# EAGLE board DarkESC (EAGLE 9.0.0)
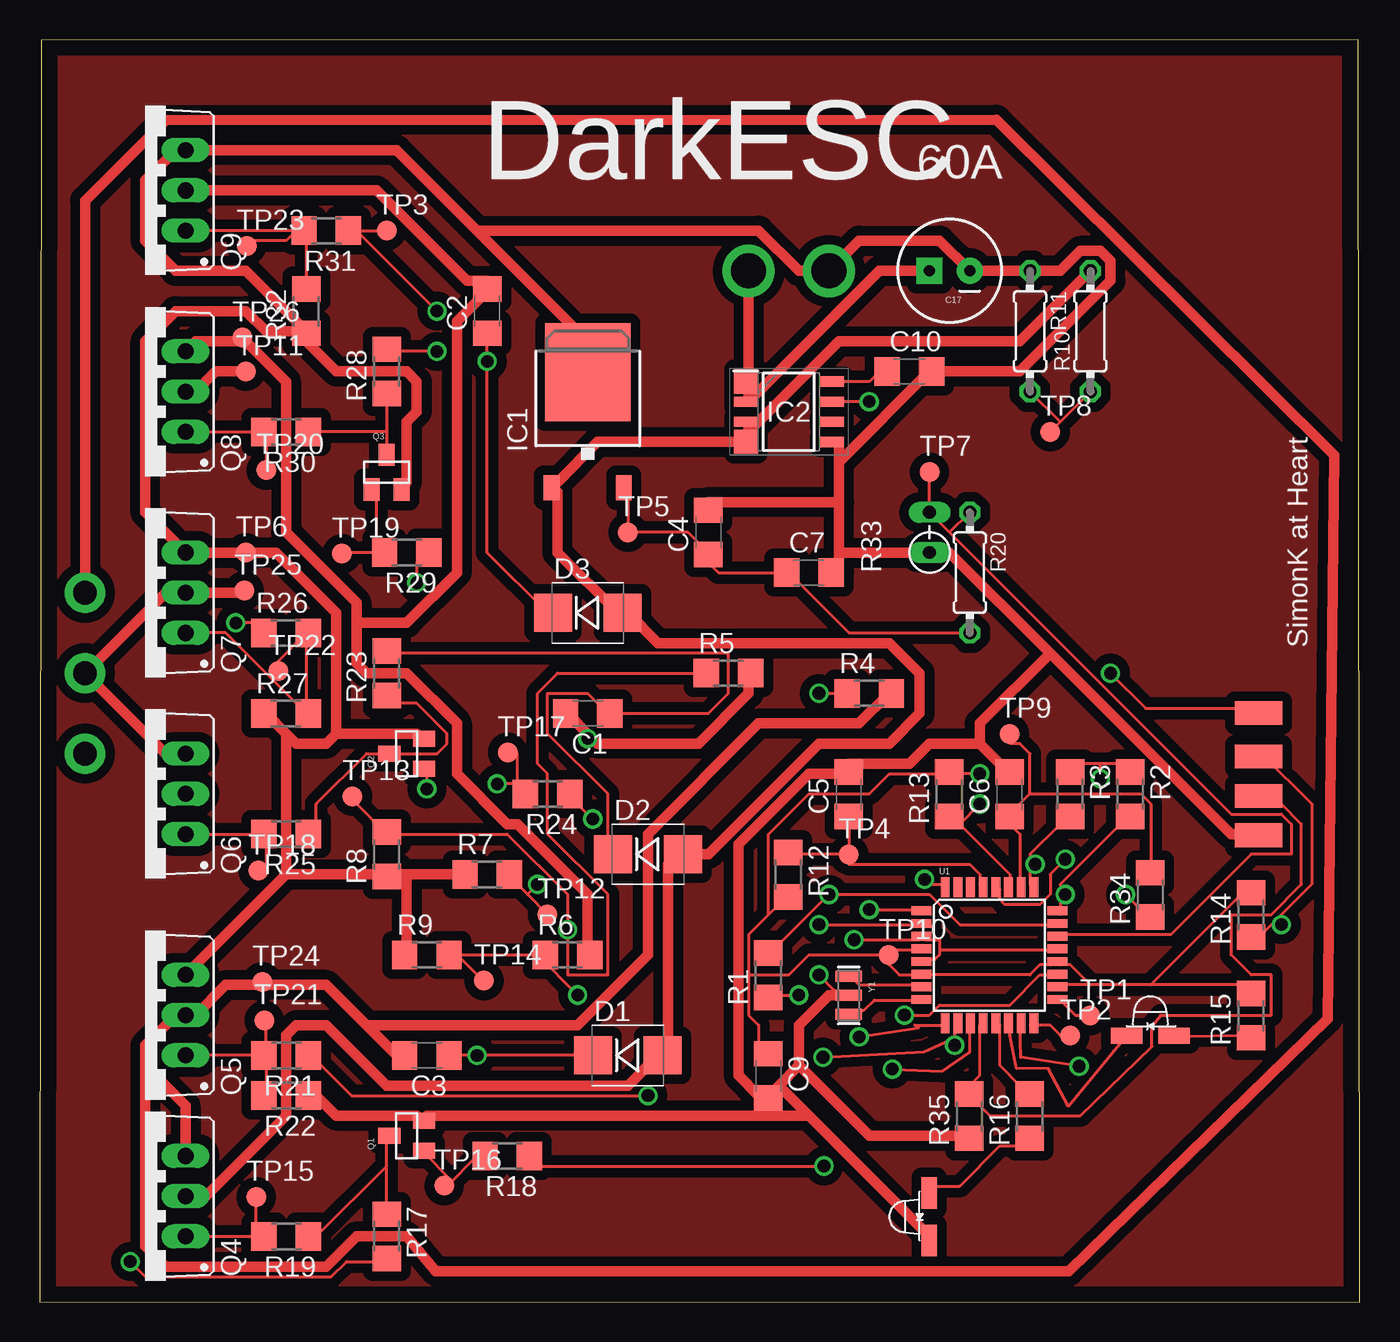
[diagram p0: board, top side]
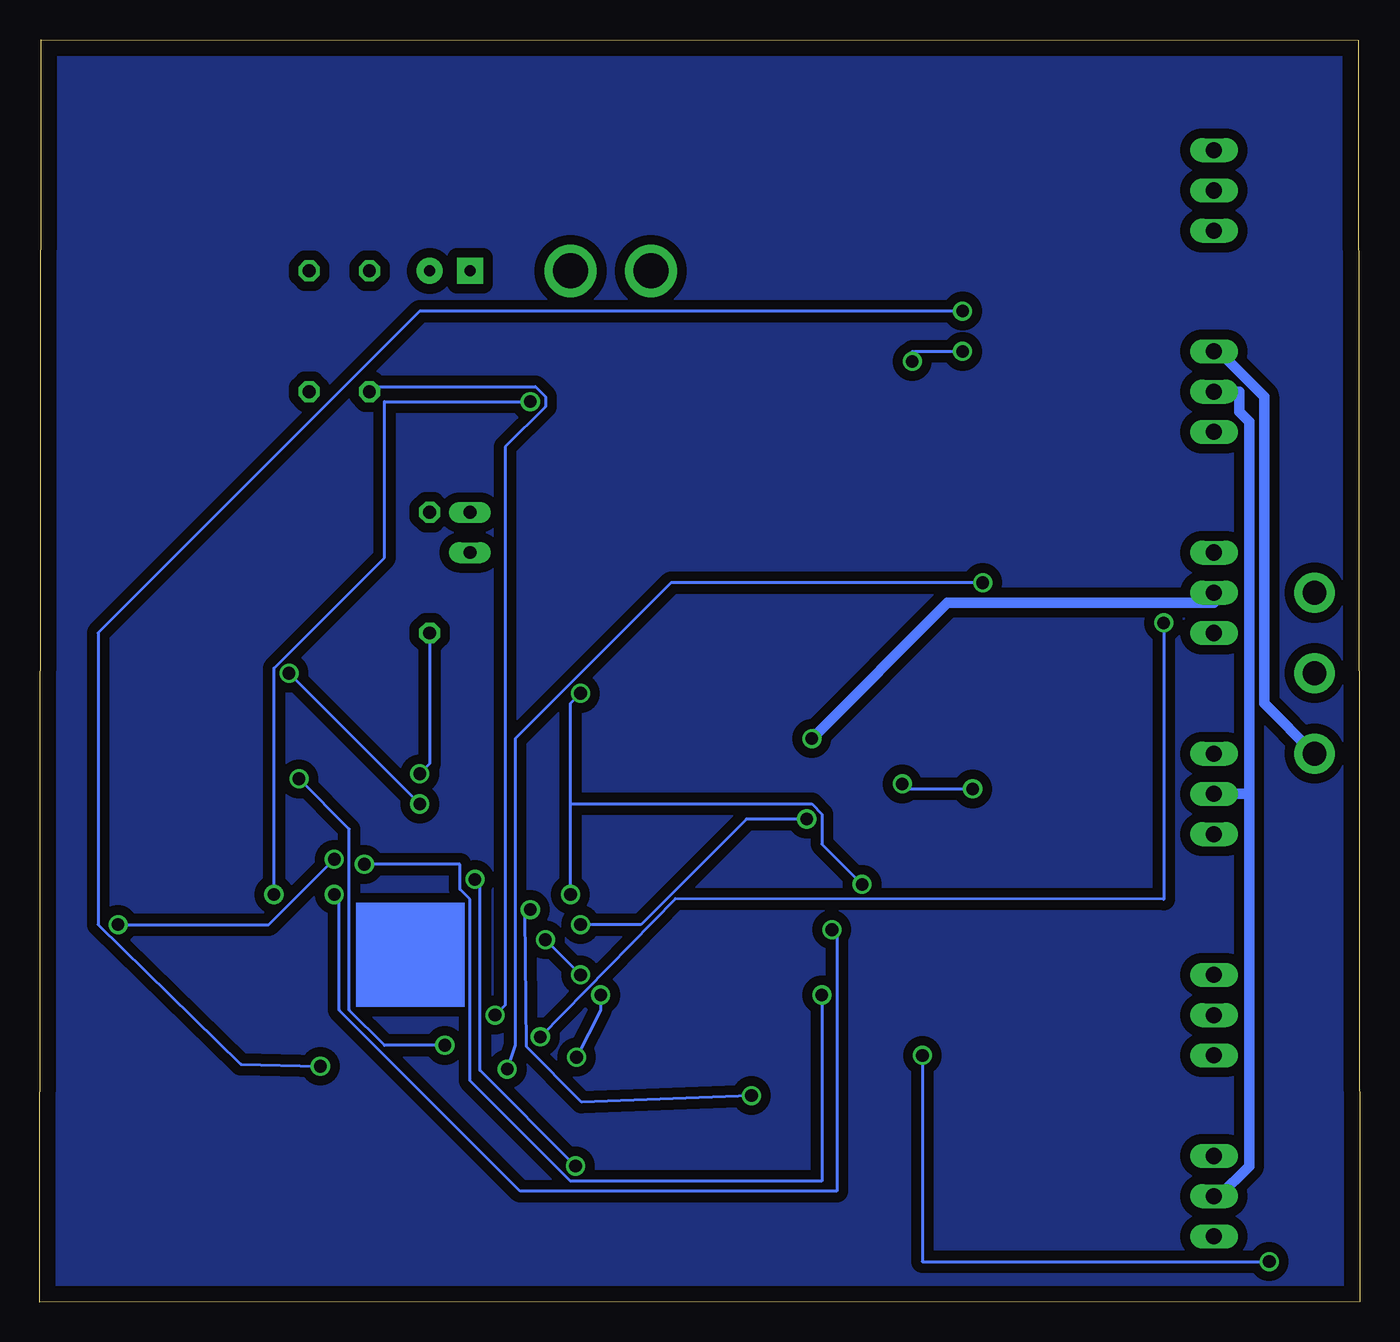
[diagram p1: board, bottom side, seen from below]

Size 83.39 x 79.73 mm. Coordinates in mm from the lower left corner, seen from the top.
Outline: 0,0.05 83.39,0 83.29,79.73 0.1,79.68 0,0.05
Copper layers (1*16): Top 0.035mm / dielectric 1.5mm / Bottom 0.035mm
Design rules "default *": minimum track width 6mil, minimum drill 0.8mm, track to track 6mil, track to pad 6mil, pad to pad 6mil, via to via 6mil, smd to smd 6mil, copper to edge 40mil, drill to drill 6mil, minimum pad ring 10mil, minimum via ring 8mil, stop-mask expansion 4mil, vias tented up to drill 0mil, thermal gap 10mil
Net classes: 0 default: width 0.203 mm, clearance 0.152 mm; 1 HP: width 0.66 mm, clearance 0.203 mm

## Footprints (pad centres in the part's own frame; a part is rotated, then mirrored left to right if it is on the bottom)
C3216 = smd 1.6 x 1.8: 1 -1.4,0; 2 1.4,0
CPOL-RADIAL-100UF-25V = drill 0.7 pad 1.651 square: 1 1.27,0 | drill 0.7 pad 1.651: 2 -1.27,0
SMB-DIODE = smd 2.4 x 2.4: A 2.2,0; C -2.2,0
TO252 = smd 1 x 1.6: 1 -2.28,-4.8; 2 2.28,-4.8 | smd 5.4 x 6.2: 3 0,2.5
SOIC127P600X175-8N = smd 1.525 x 1.524: 1 -2.712,1.905; 4 -2.712,-1.905 | smd 1.525 x 0.65: 2 -2.712,0.635; 3 -2.712,-0.635; 5 2.712,-1.905; 6 2.712,-0.635; 7 2.712,0.635; 8 2.712,1.905
SMT-LED-3X2-RA = smd 2 x 1: 1 1.5,0; 2 -1.5,0
SOT23 = smd 1 x 1.4: 1 -0.95,-1.1; 2 0.95,-1.1; 3 0,1.1
TO220BV = drill 1.016 long: D 0,-2.54; G -2.54,-2.54; S 2.54,-2.54
R3216 = smd 1.6 x 1.8: 1 -1.4,0; 2 1.4,0
0204/7 = drill 0.813 octagon: 1 -3.81,0; 2 3.81,0
RS-2,5 = drill 0.813 long: 1 -1.27,0; 2 1.27,0
B1,27 = smd 1.27 x 1.27: TP 0,0
TQFP32-08 = smd 1.27 x 0.559: 1 -4.293,2.8; 2 -4.293,2; 3 -4.293,1.2; 4 -4.293,0.4; 5 -4.293,-0.4; 6 -4.293,-1.2; 7 -4.293,-2; 8 -4.293,-2.8; 17 4.293,-2.8; 18 4.293,-2; 19 4.293,-1.2; 20 4.293,-0.4; 21 4.293,0.4; 22 4.293,1.2; 23 4.293,2; 24 4.293,2.8 | smd 0.559 x 1.27: 9 -2.8,-4.293; 10 -2,-4.293; 11 -1.2,-4.293; 12 -0.4,-4.293; 13 0.4,-4.293; 14 1.2,-4.293; 15 2,-4.293; 16 2.8,-4.293; 25 2.8,4.293; 26 2,4.293; 27 1.2,4.293; 28 0.4,4.293; 29 -0.4,4.293; 30 -1.2,4.293; 31 -2,4.293; 32 -2.8,4.293
PAD-PTH-MED-1 = drill 2.2 pad 3.302: P$1 0,0
PAD-PTH-18AWG-1 = drill 1.5 pad 2.54: P$1 0,0
PAD-1.5X3MM = smd 3 x 1.5: P$1 0,0
RESONATOR-SMD = smd 0.7 x 1.7: 1 -1.2,0; 2 0,0; 3 1.2,0

## Placement (x,y rotation side)
C1  1uF 60V  [C3216]  34.62,37.19 180 top
C2  1uF 60V  [C3216]  28.27,62.59 90 top
C3  1uF 60V  [C3216]  24.46,15.6 180 top
C4  0.1uF  [C3216]  42.24,48.62 90 top
C5  0.1uF  [C3216]  51.1,32.08 90 top
C6  1uF  [C3216]  61.26,32.08 90 top
C7  0.1uF  [C3216]  48.59,46.08 0 top
C9  1uF  [C3216]  46.02,14.3 270 top
C10  0.1uF  [C3216]  54.94,58.78 0 top
C17  1000uF  [CPOL-RADIAL-100UF-25V]  57.48,65.13 180 top
D1  Schottky  [SMB-DIODE]  37.16,15.6 0 top
D2  Schottky  [SMB-DIODE]  38.43,28.3 0 top
D3  Schottky  [SMB-DIODE]  34.62,43.54 0 top
IC1  7805DT  [TO252]  34.62,56.24 0 top
IC2  ACS712ELCTR-20A-T  [SOIC127P600X175-8N]  47.32,56.24 0 top
LED1  BLUE  [SMT-LED-3X2-RA]  70.15,16.84 0 top
LED2  RED  [SMT-LED-3X2-RA]  56.18,5.41 90 top
Q1  BC817-40W  [SOT23]  23.19,10.52 90 top
Q2  BC817-40W  [SOT23]  23.19,34.65 90 top
Q3  BC817-40W  [SOT23]  21.92,52.43 0 top
Q4  IRF520  [TO220BV]  6.68,6.71 90 top
Q5  IRF520  [TO220BV]  6.68,18.14 90 top
Q6  IRF520  [TO220BV]  6.68,32.11 90 top
Q7  IRF520  [TO220BV]  6.68,44.81 90 top
Q8  IRF520  [TO220BV]  6.68,57.51 90 top
Q9  IRF520  [TO220BV]  6.68,70.21 90 top
R1  47K  [R3216]  46.02,20.65 90 top
R2  47K  [R3216]  68.88,32.08 270 top
R3  47K  [R3216]  65.07,32.08 270 top
R4  47K  [R3216]  52.4,38.46 0 top
R5  47K  [R3216]  43.51,39.73 0 top
R6  47K  [R3216]  33.35,21.95 0 top
R7  4.7K  [R3216]  28.27,27.03 0 top
R8  4.7K  [R3216]  21.92,28.3 90 top
R9  4.7K  [R3216]  24.46,21.95 0 top
R10  18K 1%  [0204/7]  66.37,61.32 90 top
R11  3.3K 1%  [0204/7]  62.56,61.32 270 top
R12  10K  [R3216]  47.29,27 270 top
R13  10K  [R3216]  57.45,32.08 90 top
R14  10K  [R3216]  76.5,24.46 90 top
R15  1K  [R3216]  76.5,18.11 90 top
R16  4.7K  [R3216]  62.53,11.76 90 top
R17  2.2K  [R3216]  21.92,4.17 270 top
R18  4.7K  [R3216]  29.54,9.25 180 top
R19  100  [R3216]  15.57,4.17 180 top
R20  3.3K 1%  [0204/7]  58.75,46.08 270 top
R21  100  [R3216]  15.57,15.6 180 top
R22  10K  [R3216]  15.57,13.06 180 top
R23  2.2K  [R3216]  21.92,39.73 90 top
R24  4.7K  [R3216]  32.08,32.11 180 top
R25  100  [R3216]  15.57,29.57 180 top
R26  100  [R3216]  15.57,42.27 0 top
R27  10K  [R3216]  15.57,37.19 0 top
R28  2.2K  [R3216]  21.92,58.78 90 top
R29  4.7K  [R3216]  23.19,47.35 180 top
R30  100  [R3216]  15.57,54.97 180 top
R31  100  [R3216]  18.11,67.67 180 top
R32  10K  [R3216]  16.84,62.59 90 top
R33  10K NTC  [RS-2,5]  56.21,48.62 90 top
R34  47K  [R3216]  70.15,25.73 90 top
R35  470K  [R3216]  58.72,11.76 90 top
TP1  TPB1,27  [B1,27]  66.34,18.11 0 top
TP2  TPB1,27  [B1,27]  65.07,16.84 0 top
TP3  TPB1,27  [B1,27]  21.92,67.67 0 top
TP4  TPB1,27  [B1,27]  51.1,28.27 0 top
TP5  TPB1,27  [B1,27]  37.16,48.62 0 top
TP6  TPB1,27  [B1,27]  13.03,47.35 0 top
TP7  TPB1,27  [B1,27]  56.21,52.43 0 top
TP8  TPB1,27  [B1,27]  63.83,54.97 0 top
TP9  TPB1,27  [B1,27]  61.26,35.89 0 top
TP10  TPB1,27  [B1,27]  53.64,21.92 0 top
TP11  TPB1,27  [B1,27]  13.03,58.78 0 top
TP12  TPB1,27  [B1,27]  32.08,24.49 0 top
TP13  TPB1,27  [B1,27]  19.76,31.95 0 top
TP14  TPB1,27  [B1,27]  28.07,20.32 0 top
TP15  TPB1,27  [B1,27]  13.69,6.65 0 top
TP16  TPB1,27  [B1,27]  25.55,7.37 0 top
TP17  TPB1,27  [B1,27]  29.57,34.72 0 top
TP18  TPB1,27  [B1,27]  13.82,27.25 0 top
TP19  TPB1,27  [B1,27]  19.1,47.27 0 top
TP20  TPB1,27  [B1,27]  14.33,52.55 0 top
TP21  TPB1,27  [B1,27]  14.2,17.81 0 top
TP22  TPB1,27  [B1,27]  15.09,39.85 0 top
TP23  TPB1,27  [B1,27]  13.08,66.7 0 top
TP24  TPB1,27  [B1,27]  14.07,20.24 0 top
TP25  TPB1,27  [B1,27]  12.93,44.93 0 top
TP26  TPB1,27  [B1,27]  12.8,60.91 0 top
U1  ATMEGA168  [TQFP32-08]  59.99,21.92 0 top
U$1  PADPTH-MED  [PAD-PTH-MED-1]  44.78,65.13 0 top
U$2  PADPTH-MED  [PAD-PTH-MED-1]  49.86,65.13 0 top
U$5  PAD18AWG  [PAD-PTH-18AWG-1]  2.87,44.81 0 top
U$6  PAD18AWG  [PAD-PTH-18AWG-1]  2.87,39.73 0 top
U$7  PAD18AWG  [PAD-PTH-18AWG-1]  2.87,34.65 0 top
U$11  PAD1.5X3MM  [PAD-1.5X3MM]  76.99,29.49 0 top
U$12  PAD1.5X3MM  [PAD-1.5X3MM]  76.99,37.21 0 top
U$13  PAD1.5X3MM  [PAD-1.5X3MM]  76.99,34.47 0 top
U$14  PAD1.5X3MM  [PAD-1.5X3MM]  76.99,31.98 0 top
Y1  RESONATORSMD  [RESONATOR-SMD]  51.1,19.38 270 top

## Library data of the parts
C1-C7 C9 C10 = rcl; SPICEPREFIX: C
C17 = SparkFun-Capacitors
D1-D3 = SparkFun-DiscreteSemi; PROD_ID: DIO-09646
IC1 = linear
IC2 = SamacSys_Parts; ALLIED_NUMBER: R1076682; ALLIED_PRICE/STOCK: http://www.alliedelec.com/allegro-microsystems-acs712elctr-20a-t/R1076682/; ARROW_PART_NUMBER: ACS712ELCTR-20A-T; ARROW_PRICE/STOCK: https://www.arrow.com/en/products/acs712elctr-20a-t/allegro-microsystems; DESCRIPTION: ACS712ELCTR-20A-T, Hall Effect Sensor 5V 8-Pin SOIC, SOIC N; HEIGHT: 1.75mm; MANUFACTURER_NAME: Allegro Microsystems; MANUFACTURER_PART_NUMBER: ACS712ELCTR-20A-T; RS_PART_NUMBER: 1729271; RS_PRICE/STOCK: http://uk.rs-online.com/web/p/products/1729271
LED1 LED2 U$1 U$2 U$5-U$7 U$11-U$14 = BR-Eagle-Library
Q1-Q3 = SparkFun-DiscreteSemi
Q4-Q9 = transistor-power
R1-R32 R34 R35 = resistor
R33 = varistor
TP1-TP26 = testpad
U1 = SparkFun-DigitalIC
Y1 = SparkFun

## Nets
CENTER: R1.1 R2.1 R3.1 U1.10
CURRENT_ADC: IC2.7 R34.1
CURRENT_ADC_FILTERED: C6.1 R34.2 TP9.TP U1.26
GATE_AH: Q4.G R19.2 TP15.TP
GATE_AL: Q5.G R21.2 R22.2 TP21.TP
GATE_BH: Q6.G R25.2 TP18.TP
GATE_BL: Q7.G R26.2 R27.2 TP22.TP
GATE_CH: Q8.G R30.2 TP20.TP
GATE_CL: Q9.G R31.2 R32.2 TP23.TP
GND: C4.2 C5.2 C6.2 C7.2 C9.2 C10.2 C17.2 IC1.3 IC2.5 LED2.2 Q1.2 Q2.2 Q3.2 Q5.S Q7.S Q9.S R7.1 R8.1 R9.1 R11.1 R22.1 R27.1 R32.1 R33.1 R35.1 TP6.TP U1.3 U1.5 U1.21 U$2.P$1 U$11.P$1 Y1.2
LED_STATUS: LED1.2 U1.14
LED_WARN: R16.2 U1.13
MISO: TP2.TP U1.16
N$2: Q1.1 R18.2 TP16.TP
N$3: LED2.1 R16.1
N$4: Q1.3 R17.1 R19.1
N$5: Q2.1 R24.2 TP17.TP
N$6: Q2.3 R23.1 R25.1
N$7: Q3.1 R29.2 TP19.TP
N$9: Q3.3 R28.1 R30.1
N$10: U1.7 Y1.1
N$11: U1.8 Y1.3
N$12: C3.1 D1.C R17.2
N$15: C1.1 D2.C R23.2
N$16: LED1.1 R15.1
N$19: C2.1 D3.C R28.2
PHASE_A [HP]: C3.2 Q4.S Q5.D R4.2 TP24.TP U$5.P$1
PHASE_B [HP]: C1.2 Q6.S Q7.D R5.2 TP25.TP U$6.P$1
PHASE_C [HP]: C2.2 Q8.S Q9.D R6.2 TP26.TP U$7.P$1
PWM: R35.2 U1.12 U$14.P$1
PWM_AH: R18.1 U1.32
PWM_AL: R21.1 U1.1
PWM_BH: R24.1 U1.2
PWM_BL: R26.1 U1.9
PWM_CH: R29.1 U1.11
PWM_CL: R31.1 TP3.TP U1.15
RESET: C5.1 R12.1 TP4.TP U1.29
RX: U1.30
SCK: TP1.TP U1.17
SCL: R14.1 U1.28 U$13.P$1
SDA: R13.1 U1.27 U$12.P$1
SENSE_A: R1.2 R4.1 R7.2 TP12.TP U1.23
SENSE_B: R2.2 R5.1 R8.2 TP13.TP U1.24
SENSE_C: R3.2 R6.1 R9.2 TP14.TP U1.25
TEMP_ADC: R20.1 R33.2 TP7.TP U1.22
TX: U1.31
VBAT [HP]: D1.A D2.A D3.A IC1.1 IC2.3 IC2.4 Q4.D Q6.D Q8.D R10.2 TP11.TP
VBAT+ [HP]: C17.1 IC2.1 IC2.2 U$1.P$1
VBAT_ADC: R10.1 R11.2 TP8.TP U1.19
VCC5V: C4.1 C7.1 C9.1 IC1.2 R12.2 R13.2 R14.2 R15.2 R20.2 TP5.TP TP10.TP U1.4 U1.6 U1.18 U1.20
VCC5V-2: C10.1 IC2.8

## Tracks (layer width: path | path; a pad name or v marks a point on that pad's centre or on a via)
CENTER  (via drill 0.8)
  Top 0.203: 67.01,34.01 68.28,34.01 R2.1 | 67.01,34.01 65.1,34.01 R3.1 | 57.48,16.55 55.85,15.81 v49.48,15.48 | 57.48,16.55 57.8,16.87 57.8,17.5 U1.10 | v47.96,19.41 46.05,19.41 R1.1 | v67.01,33.06 67.01,34.01 | 57.48,16.55 v57.8,16.23
  Bottom 0.203: v49.48,15.48 47.96,18.45 v47.96,19.41 | v67.01,33.06 63.83,29.88 63.83,18.45 61.61,16.23 v57.8,16.23
CURRENT_ADC  (via drill 0.8)
  Top 0.203: v52.4,56.87 IC2.7 | v68.59,25.76 69.86,24.49 R34.1
  Bottom 0.203: v52.4,56.87 61.61,56.87 61.61,47.03 68.59,40.04 v68.59,25.76
CURRENT_ADC_FILTERED
  Top 0.203: U1.26 61.93,26.39 61.93,29.57 61.29,30.2 C6.1 61.29,30.84 62.56,32.11 | 62.56,32.11 62.56,34.65 61.93,35.28 61.29,35.28 TP9.TP | 62.56,32.11 69.55,32.11 70.18,31.47 70.18,27.66 R34.2
GATE_AH
  Top 0.203: 13.67,4.17 13.67,6.07 TP15.TP | Q4.G 13.67,4.17 | 13.67,4.17 R19.2
GATE_AL
  Top 0.203: 14.3,15.6 14.3,17.5 TP21.TP | 14.3,15.6 14.3,13.06 R22.2 | 14.3,15.6 R21.2 Q5.G
GATE_BH
  Top 0.203: TP18.TP 14.3,27.66 14.3,29.57 R25.2 Q6.G
GATE_BL
  Top 0.203: 16.84,42.27 14.94,40.36 TP22.TP | 16.84,42.27 16.84,37.19 | 16.84,42.27 R26.2 | Q7.G 11.76,42.27 16.84,37.19 | 16.84,37.19 R27.2
GATE_CH
  Top 0.203: TP20.TP 14.3,53.06 14.3,54.97 R30.2 Q8.G
GATE_CL
  Top 0.203: 16.21,67.67 15.57,67.03 13.03,67.03 TP23.TP | R32.2 16.84,67.67 R31.2 16.21,67.67 | 16.21,67.67 Q9.G
GND  (via drill 0.8)
  Top 0.203: 56.85,22.26 56.85,22.9 55.89,22.9 U1.3 55.58,22.9 v51.45,22.9 | 56.85,22.26 56.85,21.95 56.53,21.63 55.89,21.63 U1.5 | 56.85,22.26 64.15,22.26 U1.21 | v49.23,20.68 50.18,19.72 50.18,19.41
  Top 0.66: Q3.2 23.19,51.79 23.19,55.6 23.83,56.24 23.83,58.14 23.19,58.78 18.75,58.78 16.84,60.68 R32.1 16.84,61.32 | R7.1 23.19,27.03 | 23.19,27.03 21.92,27.03 | 23.19,27.03 23.19,21.95 R9.1 | 18.75,35.92 23.83,35.92 Q2.2 | 18.75,35.92 18.11,35.28 16.21,35.28 15.57,35.92 | 15.57,35.92 14.3,37.19 R27.1 | 15.57,27.03 Q5.S | 15.57,35.92 15.57,27.03 | 18.75,35.92 18.75,43.54 14.94,47.35 TP6.TP Q7.S 6.68,49.89 6.68,60.68 8.59,62.59 13.03,62.59 14.3,61.32 16.84,61.32 | 15.57,27.03 21.92,27.03 | 21.92,27.03 R8.1 | 27.64,67.67 34.62,60.68 IC1.3 | 27.64,67.67 22.56,72.75 Q9.S 8.59,72.75 6.68,70.84 6.68,67.03 8.59,65.13 13.03,65.13 16.84,61.32 | 27.64,67.67 45.42,67.67 47.96,65.13 U$2.P$1 51.77,67.03 56.85,67.03 C17.2 R11.1 64.47,65.13 65.74,66.4 67.01,66.4 67.64,65.76 67.64,64.49 61.93,58.78 C10.2 56.21,58.78 50.5,53.06 | R22.1 17.48,13.06 18.75,11.79 23.83,11.79 Q1.2 24.46,11.79 48.59,11.79 | 47.96,14.96 47.96,17.5 49.86,19.41 50.18,19.41 50.5,19.41 Y1.2 | 46.69,13.69 46.05,13.06 C9.2 | 46.69,13.69 47.96,14.96 | 47.96,14.96 52.4,10.52 58.12,10.52 R35.1 | 46.69,13.69 48.59,11.79 | 48.59,11.79 56.21,4.17 LED2.2 | 46.69,13.69 C9.2 | 59.39,35.28 56.21,35.28 54.94,34.01 51.13,34.01 C5.2 50.5,33.38 48.59,33.38 44.15,28.93 44.15,14.33 45.42,13.06 C9.2 | 59.39,35.28 60.66,34.01 C6.2 | 50.5,47.35 50.5,46.08 C7.2 | 50.5,47.35 50.5,50.52 | 50.5,50.52 50.5,53.06 | 50.5,53.06 50.5,54.33 IC2.5 | 50.5,50.52 42.24,50.52 C4.2 | 50.5,47.35 R33.1 57.48,47.35 63.83,41 | 63.83,41 75.26,29.57 76.53,29.57 U$11.P$1 | 59.39,35.28 59.39,36.55 63.83,41
  Bottom 0.203: v49.23,20.68 v51.45,22.9
LED_STATUS
  Top 0.203: U1.14 61.29,17.5 61.29,16.87 61.7,14.78 63.73,14.76 64.97,12.4 LED1.2
LED_WARN
  Top 0.203: U1.13 60.66,17.5 60.66,14.96 61.93,13.69 R16.2
MISO
  Top 0.203: U1.16 62.56,17.5 63.83,17.5 64.47,16.87 TP2.TP
N$1
  pour Top (isolate 0.61): 0.33,79.86 0.33,0.15 83.16,0.15 83.16,79.88 0.33,79.88
N$2
  Top 0.203: Q1.1 24.46,9.25 25.73,7.98 TP16.TP 25.73,7.34 27.64,9.25 R18.2
N$3
  Top 0.203: R16.1 61.93,9.88 60.66,9.88 58.12,7.34 56.21,7.34 LED2.1
N$4
  Top 0.203: R17.1 21.92,8.61 | 21.92,8.61 21.92,10.52 Q1.3 | 21.92,8.61 17.48,4.17 R19.1
N$5  (via drill 0.8)
  Top 0.203: 30.18,32.74 30.18,32.11 R24.2 30.18,32.74 | 30.18,32.74 30.18,34.65 TP17.TP | v24.46,32.42 24.46,33.69 Q2.1 | 30.18,32.74 v28.91,32.74
  Bottom 0.203: v24.46,32.42 28.91,32.42 v28.91,32.74
N$6
  Top 0.203: R25.1 17.48,29.57 17.48,31.47 20.65,34.65 Q2.3 25.1,34.65 25.73,35.28 25.73,35.92 23.83,37.82 21.92,37.82 R23.1
N$7
  Top 0.203: 21.29,47.35 19.38,47.35 TP19.TP | 21.29,47.35 21.29,51.16 Q3.1 | 21.29,47.35 R29.2
N$8
  pour Bottom (isolate 0.61): 0.1,79.68 0.1,0 83.39,0 83.39,79.68
N$9
  Top 0.203: R28.1 21.92,54.97 | 21.92,54.97 Q3.3 | 21.92,54.97 R30.1
N$10
  Top 0.203: U1.7 55.58,20.04 51.77,20.04 51.13,20.68 Y1.1
N$11
  Top 0.203: U1.8 55.58,19.09 52.72,19.09 52.08,18.45 51.13,18.45 Y1.3
N$12  (via drill 0.8)
  Top 0.203: D1.C v27.64,15.6 C3.1 | v5.73,2.58 6.68,1.63 18.43,1.63 19.38,2.58 21.92,2.58 R17.2
  Bottom 0.203: v5.73,2.58 27.64,2.58 v27.64,15.6
N$15
  Top 0.203: D2.C 35.89,28.3 35.89,32.11 32.08,35.92 32.08,38.46 34.62,38.46 35.89,37.19 C1.1 42.24,37.19 43.51,38.46 43.51,41 21.92,41 R23.2
N$16
  Top 0.203: R15.1 75.9,16.87 72.06,16.79 LED1.1
N$19  (via drill 0.8)
  Top 0.203: C2.1 v28.27,59.41 28.27,47.35 32.08,43.54 D3.C | v25.1,60.05 21.92,60.05 R28.2
  Bottom 0.203: v25.1,60.05 28.27,60.05 v28.27,59.41
PHASE_A
  Top 0.66: 20.65,17.5 22.56,15.6 C3.2 | 20.65,17.5 18.11,20.04 14.3,20.04 TP24.TP 13.67,20.04 11.76,20.04 9.86,18.14 Q5.D 8.59,18.14 6.68,16.23 6.68,14.96 | 20.65,17.5 33.99,17.5 38.43,21.95 38.43,29.57 45.42,36.55 51.77,36.55 53.67,38.46 R4.2 | Q4.S 9.22,12.42 6.68,14.96 | U$5.P$1 2.87,69.57 7.95,74.65 60.43,74.68 81.76,53.49 81.36,17.91 65.02,1.98 25.02,1.98 23.19,4.17 20.02,4.17 18.11,2.26 7.95,2.26 6.68,3.53 6.68,14.96
PHASE_B  (via drill 0.8)
  Top 0.66: TP25.TP 12.4,44.81 Q7.D 7.95,44.81 U$6.P$1 7.95,34.65 Q6.S | 34.78,35.76 35.26,35.28 41.61,35.28 44.78,38.46 44.78,39.73 R5.2 | 34.78,35.76 33.35,37.19 C1.2 | v34.62,35.6 34.78,35.76
  Bottom 0.66: v34.62,35.6 26.05,44.17 9.22,44.17 Q7.D
PHASE_C
  Top 0.66: Q9.D 21.29,70.21 27,64.49 28.27,64.49 C2.2 28.27,63.86 26.37,61.95 26.37,46.08 23.19,42.9 20.02,42.9 | Q8.S 9.86,60.68 12.4,60.68 TP26.TP 15.57,58.14 15.57,48.62 20.02,44.17 20.02,42.9 | 20.02,42.9 20.02,40.36 20.65,39.73 23.19,39.73 26.37,36.55 26.37,33.38 29.54,30.2 30.18,30.2 34.62,25.76 34.62,21.95 R6.2
  Bottom 0.66: U$7.P$1 6.05,37.82 6.05,57.19 8.9,60.05 Q8.S
PWM
  Top 0.203: U1.12 59.39,17.5 59.39,14.33 58.75,13.69 R35.2 58.75,13.06 60.02,11.79 65.74,11.79 70.26,16.15 70.26,17.42 70.82,18.14 77.8,18.14 77.8,20.68 76.53,20.68 75.26,21.95 75.26,24.49 77.8,24.49 79.71,26.39 79.71,30.2 78.44,31.47 77.17,31.47 U$14.P$1
PWM_AH  (via drill 0.8)
  Top 0.203: v55.89,26.71 56.21,26.39 57.16,26.39 U1.32 | v49.54,8.61 31.76,8.61 31.13,9.25 R18.1
  Bottom 0.203: v55.89,26.71 55.58,26.39 55.58,14.64 v49.54,8.61
PWM_AL  (via drill 0.8)
  Top 0.203: v52.4,24.8 55.58,24.8 U1.1 | v38.43,13.06 19.7,13.06 17.16,15.6 R21.1
  Bottom 0.203: v52.4,24.8 52.72,24.49 52.64,16.14 49.15,12.65 v38.43,13.06
PWM_BH  (via drill 0.8)
  Top 0.203: v49.23,23.85 55.58,23.85 U1.2 | v34.94,30.52 33.35,32.11 R24.1
  Bottom 0.203: v49.23,23.85 45.42,23.85 38.75,30.52 v34.94,30.52
PWM_BL  (via drill 0.8)
  Top 0.203: v51.77,16.76 55.54,17.35 55.26,17.5 57.16,17.5 U1.9 | v12.4,42.9 13.35,42.9 13.98,42.27 R26.1
  Bottom 0.203: v51.77,16.76 43.24,25.49 12.4,25.44 v12.4,42.9
PWM_CH  (via drill 0.8)
  Top 0.203: v53.86,14.73 57.04,14.6 58.75,15.79 58.75,17.5 U1.11 | v23.83,45.44 23.83,46.71 24.46,47.35 R29.1
  Bottom 0.203: v53.86,14.73 53.35,16.23 53.35,35.6 43.51,45.44 v23.83,45.44
PWM_CL  (via drill 0.8)
  Top 0.203: 20.02,67.67 TP3.TP | v65.66,14.91 61.98,15.47 61.93,17.5 U1.15 | 20.02,67.67 v25.1,62.59 | 20.02,67.67 R31.1
  Bottom 0.203: v65.66,14.91 70.69,15.04 79.71,23.85 79.71,42.27 59.39,62.59 v25.1,62.59
RESET
  Top 0.203: TP4.TP 51.13,28.3 51.13,30.2 C5.1 | U1.29 59.39,26.39 59.39,27.03 58.75,27.66 51.13,27.66 TP4.TP | R12.1 47.32,28.3 50.5,28.3 TP4.TP
SCK
  Top 0.203: TP1.TP 66.05,18.14 65.42,18.14 64.47,19.09 U1.17
SCL  (via drill 0.8)
  Top 0.203: 78.12,24.17 80.34,26.39 80.34,31.47 77.17,34.65 U$13.P$1 | 78.12,24.17 77.17,23.22 76.53,23.22 R14.1 | v64.78,27.98 63.83,27.03 63.83,25.76 63.2,25.12 60.97,25.12 60.66,25.44 60.66,26.07 U1.28 | 78.12,24.17 v78.44,23.85
  Bottom 0.203: v64.78,27.98 68.91,23.85 v78.44,23.85
SDA  (via drill 0.8)
  Top 0.203: 58.12,30.2 57.48,30.84 R13.1 58.12,30.2 | 58.12,30.2 61.29,27.03 61.29,26.39 U1.27 | v67.64,39.73 69.86,37.5 76.85,37.5 U$12.P$1 | 58.12,30.2 v59.39,31.47
  Bottom 0.203: v59.39,31.47 v67.64,39.73
SENSE_A  (via drill 0.8)
  Top 0.203: 30.81,25.76 29.54,27.03 R7.2 | 30.81,25.76 TP12.TP | U1.23 63.83,23.85 58.12,23.85 56.21,25.76 v49.86,25.76 46.05,21.95 R1.2 | v49.23,38.46 R4.1 | v31.45,26.39 30.81,25.76
  Bottom 0.203: v49.23,38.46 49.86,37.82 49.86,31.47 | v49.86,25.76 49.86,31.47 | v31.45,26.39 33.99,28.93 33.99,30.84 34.62,31.47 49.86,31.47
SENSE_B  (via drill 0.8)
  Top 0.203: 21.92,29.57 20.02,31.47 TP13.TP | R5.1 32.72,39.73 31.45,38.46 31.45,34.01 32.08,33.38 32.08,29.57 35.89,25.76 35.89,20.68 33.35,20.68 v33.35,23.53 33.35,25.76 29.54,29.57 21.92,29.57 | 21.92,29.57 R8.2 | 64.47,25.76 64.47,26.39 68.28,30.2 R2.2 | 64.47,25.76 64.47,24.49 U1.24 | v64.78,25.76 64.47,25.76
  Bottom 0.203: v64.78,25.76 64.47,25.44 64.47,18.45 53.04,7.02 33.03,7.02 33.03,23.22 v33.35,23.53
SENSE_C  (via drill 0.8)
  Top 0.203: 26.37,21.95 27.64,20.68 TP14.TP | 26.37,21.95 31.45,21.95 | 26.37,21.95 R9.2 | 62.56,27.66 62.56,28.3 64.47,30.2 R3.2 | 62.56,27.66 62.56,26.39 U1.25 | v62.88,27.66 62.56,27.66 | 31.45,21.95 v33.99,19.41 | 31.45,21.95 R6.1
  Bottom 0.203: v62.88,27.66 56.85,27.66 56.85,26.07 56.21,25.44 56.21,14.01 49.86,7.66 33.99,7.66 v33.99,19.41
TEMP_ADC
  Top 0.203: 57.48,48.62 R33.2 TP7.TP | 57.48,48.62 75.26,30.84 78.44,30.84 79.07,30.2 79.07,28.3 76.53,28.3 71.45,23.22 64.47,23.22 U1.22 | 57.48,48.62 R20.1
VBAT
  Top 0.66: Q4.D 10.49,6.71 15.57,11.79 15.57,16.87 16.21,17.5 18.11,17.5 21.92,13.69 37.16,13.69 39.07,15.6 D1.A 39.7,15.6 39.7,27.66 40.34,28.3 D2.A 42.24,28.3 49.23,35.28 53.67,35.28 55.58,37.19 55.58,39.73 53.67,41.63 39.07,41.63 37.16,43.54 D3.A 36.53,43.54 32.72,47.35 32.72,51.16 IC1.1 32.72,51.79 35.26,54.33 IC2.4 | 44.78,54.97 44.78,55.6 IC2.3 | 44.78,54.97 44.78,54.33 IC2.4 | R10.2 61.93,60.68 50.5,60.68 44.78,54.97 | 44.78,54.97 IC2.4 | TP11.TP 11.13,58.78 9.86,57.51 Q8.D
  Bottom 0.66: 7,32.11 Q6.D | 7,32.11 7,8.61 8.9,6.71 Q4.D | Q8.D 7.63,57.51 7.63,56.24 7,55.6 7,32.11
VBAT+
  Top 0.66: 44.78,58.14 44.78,56.87 | U$1.P$1 44.78,58.14 | 44.78,58.14 IC2.1 | C17.1 53.04,65.13 44.78,56.87 | 44.78,56.87 IC2.2
VBAT_ADC  (via drill 0.8)
  Top 0.203: R10.1 64.47,55.6 | 64.47,55.6 TP8.TP | 64.47,55.6 R11.2 | v54.62,18.14 56.21,18.14 56.85,18.77 61.29,18.77 63.2,20.68 64.15,20.68 U1.19
  Bottom 0.203: v54.62,18.14 53.99,18.77 53.99,54.01 51.45,56.55 51.45,57.19 52.08,57.82 62.56,57.82 R11.2
VCC5V  (via drill 0.8)
  Top 0.203: TP10.TP 53.67,21.31 54.31,20.68 55.58,20.68 U1.6 56.21,20.68 62.56,20.68 63.2,21.31 63.83,21.31 U1.20 64.47,21.31 65.1,21.31 66.37,20.04 | 70.18,20.04 75.9,20.04 R15.2 | 70.18,20.04 66.37,20.04 | 66.37,20.04 64.47,20.04 U1.18 | 70.18,20.04 75.9,25.76 R14.2 | 44.78,20.68 44.78,23.22 46.05,24.49 | 44.78,20.68 44.78,18.14 45.42,17.5 45.42,16.23 C9.1 | 46.05,24.49 46.69,25.12 R12.2 | 46.05,24.49 46.05,29.57 48.59,32.11 52.4,32.11 53.67,33.38 56.85,33.38 R13.2 57.48,33.38 v59.39,33.38 | 44.78,20.68 47.32,20.68 48.59,21.95 53.04,21.95 TP10.TP | IC1.2 37.16,51.16 TP5.TP 40.97,48.62 42.24,47.35 C4.1 42.24,46.71 42.88,46.08 C7.1 47.32,46.08 51.13,42.27 R20.2 | TP10.TP 53.99,22.26 55.58,22.26 U1.4
  Bottom 0.203: v59.39,33.38 58.75,34.01 R20.2
VCC5V-2
  Top 0.203: IC2.8 52.4,58.14 53.04,58.78 C10.1
(copper drawn outside any net)
  shapes: Bottom area x1

## Text on the board
tPlace: DarkESC | 60A | SimonK at Heart